# Altium PCB PCB1.PcbDoc
Units mil, origin at the board's own origin, x right, y up, seen from the top; angles counter-clockwise.
Board outline 942 x 393.7 mil, 2 copper layers (Top Layer, Bottom Layer); 25 components, 13 nets, 101 pads, 18 vias.
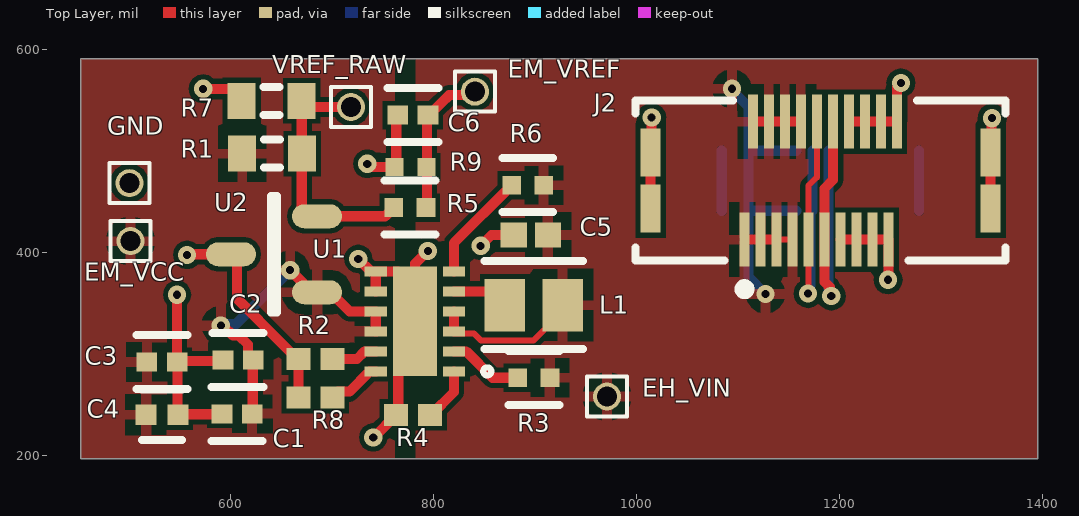
[diagram p0: Top Layer view]
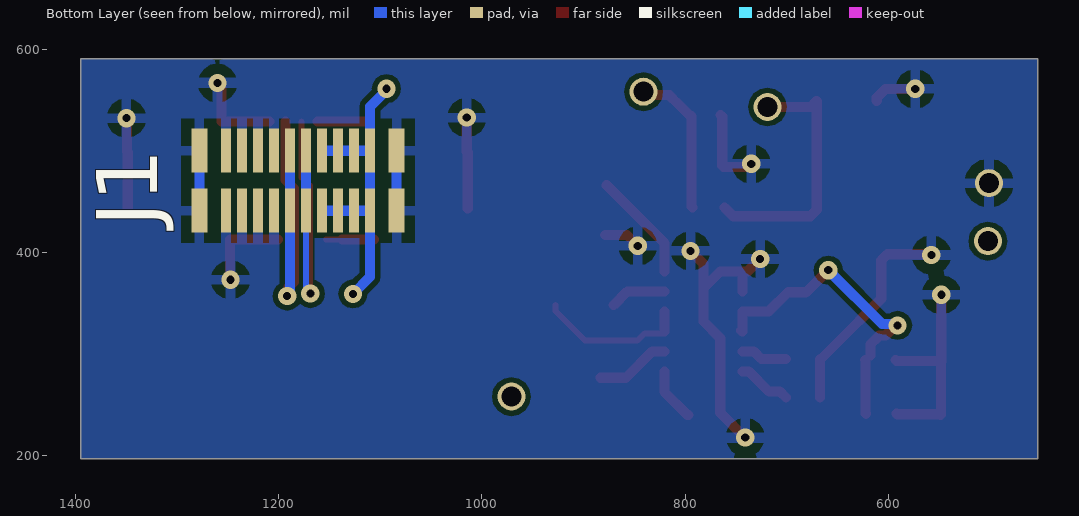
[diagram p1: Bottom Layer view, seen from below]
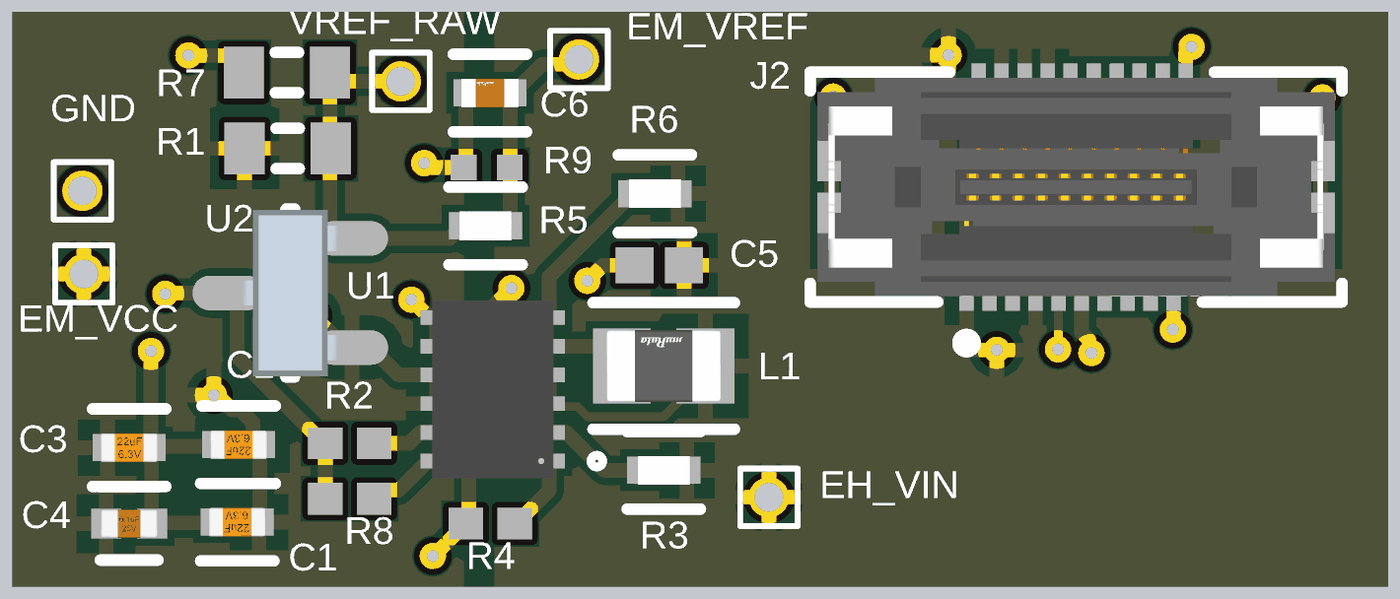
[diagram p2: 3D render of the assembled board from above, using the file's embedded part models]

## Layer stack, top to bottom
Top Solder: solder mask 0.4, Solder Resist, Dk 3.5
Top Layer: signal copper 1.4
Dielectric 1: dielectric 12.6, FR-4, Dk 4.8
Bottom Layer: signal copper 1.4
Bottom Solder: solder mask 0.4, Solder Resist, Dk 3.5

## Board outline
453,196.85 453,590.55 1395,590.55 1395,196.85

## Design rules (kind name [scope] priority, off if disabled: settings)
Clearance [All] p1: gap=5 ignorepadtopadclearanceinfootprint=FALSE
PolygonConnect [All] p1: connectstyle=Relief reliefconductorwidth=10 reliefentries=4 polygonreliefangle="90 Angle" airgapwidth=10
RoutingVias [All] p1: holewidth=8 width=18 viastyle="Through Hole" minholewidth=8 minwidth=18 maxholewidth=28 maxwidth=50
SolderMaskExpansion [All] p1: expansion=4 istentingtop=FALSE
Width [All] p1: maxlimit=40 minlimit=6 preferedwidth=10
30 further rules are at their usual default settings.

## Classes and differential pairs
component class Sheet1: C1 C2 C3 C4 C5 C6 GND J1 J2 L1 R2 R3 R4 R5 R6 R7 R8 R9 U1 U2

## Components (designator, comment, footprint, x,y, rotation, side; value= is the part's Value field where it differs from the comment)
C1 "04024D226MAT2A" FP-CL05A226MQ5N6J8-IPC_C 607,241 r180 top value=22uF
C2 "04024D226MAT2A" FP-CL05A226MQ5N6J8-IPC_C 608,294 r180 top value=22uF
C3 "04024D226MAT2A" FP-CL05A226MQ5N6J8-IPC_C 533,292 r0 top value=22uF
C4 "C0402C104K8PACTU" FP-C0402-BB-MFG 533,240 r0 top value="0.10 μF"
C5 "C0402C225M9PACTU" CAPC1005X55X30NL05T10 896,417 r0 top
C6 "GRM155R71H103KA88D" FP-GRM155-0_05-IPC_C 780,535 r180 top
EH_VIN "header_pin" 1mm_header 971,258 r0 top (schematic designator *)
EM_VCC "header_pin" 1mm_header 502,411 r270 top (schematic designator *)
EM_VREF "header_pin" 1mm_header 841,558 r0 top (schematic designator *)
GND "header_pin" 1mm_header 501,468 r270 top (schematic designator *)
J1 "2039550203" 2039550203 1181.1,472.44 r0 bottom
J2 "2039560203" Molex_0_MFG 1181.32,470.56 r0 top
L1 "LQM21PN2R2NGCD" FP-LQM21PH_G0-IPC_C 899,348 r180 top
R1 "Res3" J1-0603 641.53,497 r0 top value=0
R2 "RC0402JR-070RL" RESC1005X40X25NL05T10 684,295 r0 top
R3 "CRCW04020000Z0ED" FP-CRCW0402-e3-IPC_C 899.07,276.5 r180 top
R4 "RC0402JR-070RL" RESC1005X40X25NL05T10 780.27,240 r0 top
R5 "CRCW040210M0JNED" FP-CRCW0402-e3-IPC_C 777,444 r180 top
R6 "CRCW04020000Z0ED" FP-CRCW0402-e3-IPC_C 893,466 r180 top
R7 "Res3" J1-0603 641,549 r180 top value=0
R8 "RC0402JR-070RL" RESC1005X40X25NL05T10 684,257 r0 top
R9 "RMCF0402JT2M00" RESC1005X40X25LL05T05 777.75,484 r0 top
U1 "XTPS61094DSSR" WSON_94DSSR_TEX-L 782,332 r180 top
U2 "ISL21080DIH309Z-TK" Intersil_ISL21080DIH309Z-TK_0 643.32,398 r90 top
VREF_RAW "header_pin" 1mm_header 719,543 r0 top (schematic designator *)

## Footprints (in the part's own frame and the unit in brackets; to place one, negate y for a bottom-side part, rotate by r counter-clockwise, add the part's x,y. Pads: shape width x height; smd on the part's side, far side on the other; paste and mask are expansions set on the pad)
1mm_header [mm]
  round 0.7 hole 0.5: 1(0,0)
  silkscreen extent -0.5,-0.5 0.5,0.5
2039550203 [mm]
  rect 0.25x1.1 smd mask+0.102: 1(-1.8,0.8) 2(-1.8,-0.7) 3(-1.4,0.8) 4(-1.4,-0.7) 5(-1,0.8) 6(-1,-0.7) 7(-0.6,0.8) 8(-0.6,-0.7) 9(-0.2,0.8) 10(-0.2,-0.7) 11(0.2,0.8) 12(0.2,-0.7) 13(0.6,0.8) 14(0.6,-0.7) 15(1,0.8) 16(1,-0.7) 17(1.4,0.8) 18(1.4,-0.7) 19(1.8,0.8) 20(1.8,-0.7)
  rect 0.4x1.1 smd mask+0.102: 21(-2.465,0.8) 22(-2.465,-0.7) 23(2.465,0.8) 24(2.465,-0.7)
  body extent -2.68,-1 2.68,1, height 2.9
CAPC1005X55X30NL05T10 [mm] "Chip Capacitor, 2-Leads, Body 1.00x0.50mm, IPC Medium Density"
  rect 0.66x0.62 smd: 1(-0.43,0) 2(0.43,0)
  body extent -0.53,-0.28 0.53,0.27, height 0.55
FP-C0402-BB-MFG [mm]
  rect 0.52x0.52 smd paste+0 mask+0: 1(-0.4,0) 2(0.4,0)
  silkscreen extent -0.5,-0.64 0.5,0.64, body extent -0.8,-0.4 0.8,0.4, height 0.25
FP-CL05A226MQ5N6J8-IPC_C [mil]
  rect 20.29x18.6 smd paste+0 mask+0: 1(-14.9,0) 2(14.9,0)
  silkscreen extent -25,-27 25,27, body extent -29,-15 29,15, height 10
FP-CRCW0402-e3-IPC_C [mil]
  rect 18.43x18.6 smd paste+0 mask+0: 1(-15.83,0) 2(15.83,0)
  silkscreen extent -25,-27 25,27, body extent -29,-15 29,15, height 10
FP-GRM155-0_05-IPC_C [mil]
  rect 20.29x18.6 smd paste+0 mask+0: 1(-14.9,0) 2(14.9,0)
  silkscreen extent -25,-27 25,27, body extent -29,-15 29,15, height 10
FP-LQM21PH_G0-IPC_C [mil]
  rect 39.61x51.5 smd paste+0 mask+0: 1(-28.59,0) 2(28.59,0)
  silkscreen extent -48,-43 48,43, body extent -52,-31 52,31, height 10
Intersil_ISL21080DIH309Z-TK_0 [mm]
  rrect100% 0.6x1.25 smd paste+0 mask+0: 1(-0.95,-1.075) 2(0.95,-1.075) 3(0,1.075)
  silkscreen extent -1.46,-0.08 1.46,0.08, body extent -1.45,-1.19 1.45,1.19, height 0.47
J1-0603 [mm] "Chip Resistor, Body 1.6x0.8mm, IPC High Density"
  rect 0.7x0.9 smd: 1(-0.75,0) 2(0.75,0)
  silkscreen extent -0.2,-0.35 0.2,0.35, body extent -0.85,-0.48 0.85,0.48, height 0.9
Molex_0_MFG [mm]
  rect 0.25x1.35 smd paste+0 mask+0: 1(-1.905,-1.475) 2(-1.695,1.475) 3(-1.505,-1.475) 4(-1.295,1.475) 5(-1.105,-1.475) 6(-0.895,1.475) 7(-0.705,-1.475) 8(-0.495,1.475) 9(-0.305,-1.475) 10(-0.095,1.475) 11(0.095,-1.475) 12(0.305,1.475) 13(0.495,-1.475) 14(0.705,1.475) 15(0.895,-1.475) 16(1.105,1.475) 17(1.295,-1.475) 18(1.505,1.475) 19(1.695,-1.475) 20(1.905,1.475)
  rect 0.5x1.2 smd paste+0 mask+0: 21(-4.25,0.7) 22(4.25,0.7) 23(-4.25,-0.7) 24(4.25,-0.7)
  silkscreen extent -4.62,-2.84 4.62,2, body extent -4.72,-2.25 4.72,2.25, height 0.25
RESC1005X40X25LL05T05 [mm] "Chip Resistor, 2-Leads, Body 1.00x0.50mm, IPC High Density"
  rect 0.45x0.45 smd: 1(-0.4,0) 2(0.4,0)
  body extent -0.53,-0.27 0.53,0.28, height 0.4
RESC1005X40X25NL05T10 [mm] "Chip Resistor, 2-Leads, Body 1.00x0.50mm, IPC Medium Density"
  rect 0.6x0.55 smd: 1(-0.425,0) 2(0.425,0)
  body extent -0.53,-0.27 0.53,0.28, height 0.4
WSON_94DSSR_TEX-L [mil]
  rect 22x10 smd paste+0 mask+0: 1(-38.5,49.23) 2(-38.5,29.54) 3(-38.5,9.85) 4(-38.5,-9.85) 5(-38.5,-29.54) 6(-38.5,-49.23) 7(38.5,-49.23) 8(38.5,-29.54) 9(38.5,-9.85) 10(38.5,9.85) 11(38.5,29.54) 12(38.5,49.23)
  rect 43x108 smd paste+0 mask+0: 13(0,0)
  silkscreen extent -75,45 -67,53, body extent -42,-61 41,61, height 32

## Part data
C1 C2 C3: library part CMP-13271-000001-1, "CAP CER 22UF 6.3V X5R 0402", Capacitance=22uF, Manufacturer="Samsung Electro-Mechanics", Manufacturer Part Number=CL05A226MQ5N6J8, Package=0402, Temperature="-55°C to +85°C", Temperature Characteristic=X5R, Temperature Coefficient=15%, Temperature Range High=+85°C, Temperature Range Low=-55°C, Tolerance=20%, Voltage Rating=6.3V, Automotive=No, Category=Cap, ComponentLink2Description=Datasheet, ComponentLink2URL=http://www.samsungsem.com/kr/support/library/product-catalog/__icsFiles/afieldfile/2018/11/28/MLCC.pdf, Device Class L1="Passive Components", Device Class L2=Capacitors, Device Class L3="Ceramic Capacitors", Digikey Description="CAP CER 22UF 6.3V X5R 0402", Height=0.55mm, Ipc Land Pattern Name=CAPC10050X50, Lead Free=Yes, Material=Ceramic, Octopart=https://octopart.com/cl05a226mq5n6j8-samsung-82337113, RoHS=TRUE
C4: library part CMP-2008-02046-2, "CAP CER 0.1UF 10V X5R 0402", Capacitance="0.10 μF", Manufacturer=Kemet, Package=C0402-BB, Temperature="-55°C to +125°C", Temperature Characteristic=X5R, Temperature Coefficient=15%, Temperature Range High=+125°C, Temperature Range Low=-55°C, Tolerance=0.1, Voltage Rating="10 V", Automotive=No, Category=Cap, ComponentLink2Description=Datasheet, ComponentLink2URL=https://content.kemet.com/datasheets/KEM_C1002_X7R_SMD.pdf, Device Class L1="Passive Components", Device Class L2=Capacitors, Device Class L3="Ceramic Capacitors", Digikey Description="CAP CER 0.1UF 10V X5R 0402", Height=0.55mm, Ipc Land Pattern Name=CAPC10050X50, Lead Free=Yes, Manufacturer Part Number=C0402C104K8PACTU, Material=Ceramic, Mouser Description="Capacitor 100 nF 10 VDC 0402", Octopart=https://octopart.com/c0402c104k8pactu-kemet-140039, RoHS=TRUE
C5: library part CMP-2008-02064-2, Manufacturer=Kemet, Part Number=C0402C225M9PACTU
C6: library part CMP-2008-04637-5, "Chip Multilayer Ceramic Capacitors for General Purpose, 0402, 10000pF, X7R, 15%, 10%, 50V", Capacitance=10nF, Case Code (Imperial)=0402, Case Code (Metric)=1005, Dielectric=X7R, Max Operating Temperature=125°C, Min Operating Temperature=-55°C, Package Quantity=1, Tolerance=10%, Voltage=25V, Voltage Rating=50V, Case/Package=0402, Depth=0.5mm, Height=0.5mm, Lead Free="Lead Free", Length=1mm, Material=Ceramic, Mount="Surface Mount", Number of Pins=2, Packaging="Tape and Reel", Radiation Hardening=No, REACH SVHC="No SVHC", Termination=SMD/SMT, Thickness=0.022inch, Voltage Rating (DC)=50V, Width=0.02inch
J2: "20 Position Connector Plug, Outer Shroud Contacts Surface Mount Gold", Current Rating=0.3A, Digikey Part Number=900-2039560203CT-ND, Manufacturer=Molex, Mouser Part Number=538-203956-0203, Package=0, Temperature="-40°C to +125°C", Temperature Range High=+125°C, Temperature Range Low=-40°C, Voltage Rating=40V, Automotive=No, ComponentLink1Description=Upverter, ComponentLink1URL=https://upverter.com/part/id/0a58283e91808ac4/, ComponentLink2Description=Datasheet, ComponentLink2URL=https://www.molex.com/webdocs/datasheets/pdf/en-us/2039560203_PCB_HEADERS.pdf, Conn Gender=Male, Conn Orientation=Vertical, Contact Material=Gold,Nickel, Datasheet Path=datasheets/Conn_Molex_2039560203_eec.pdf, Digikey Description="CONN PLUG 20POS SMD GOLD", Footprint Url=https://www.molex.com/pdm_docs/sd/2039560203_sd.pdf, Height=4.55mm, helpURL=https://upverter.com/part/id/0a58283e91808ac4/, Is Female=no, Lead Free=Yes, Number Of Contacts=20, Number Of Rows=2, Part Number=2039560203, Pitch=0.4mm, RoHS=TRUE, Supplier 1=Digi-Key, Supplier 2=Mouser, Supplier Part Number 1=900-2039560203CT-ND, Supplier Part Number 2=538-203956-0203, Symbol Hash=db22f1623fbfed54a22177e49599976dea34d6b12f98f445fc170047d3fb1d12, Verification Version=0.0.0.3
L1: library part CMP-06042-016317-1, "Multilayer Type Inductor for Power Lines, 0805 (2012), 2.2μH, 30%, 0.288Ω, 0.8A", Case Code (Imperial)=0805, Case Code (Metric)=2012, Current Rating=800mA, DC Resistance (DCR)=288mR, Inductance=2.2uH, Inductance Tolerance=30%, Max Operating Temperature=125°C, Min Operating Temperature=-55°C, Package Quantity=4000, Self Resonant Frequency=40MHz, Test Frequency=1MHz, Case/Package=0805, Core Material=Ferrite, DC Current=800mA, Depth=1.4mm, Height=0.9mm, Height - Seated (Max)=0.039inch, Lead Free="Lead Free", Length=2mm, Max DC Current=800mA, Military Standard=Not, Mount="Surface Mount", Packaging="Tape and Reel", Radiation Hardening=No, REACH SVHC="No SVHC", RoHS Compliant=Yes, Series=LQM, Shielding=Shielded, Termination=SMD/SMT, Tolerance=30%, Width=0.049inch
R1 R7: "Resistor", LatestRevisionDate=29-May-2009, LatestRevisionNote="IPC-7351 Footprint Added.", PackageDescription="Chip Resistor", PackageReference=J1-0603, Published=8-Jun-2000, Publisher="Altium Limited"
R2 R4 R8: library part CMP-1011-00001-2, Manufacturer="Yageo / Phycomp", Part Number=RC0402JR-070RL
R3 R6: library part CMP-2002-08122-2, "RES Thick Film, 0Ω, 0.063W, 0402", Case Code (Imperial)=0402, Case Code (Metric)=1005, Max Operating Temperature=155°C, Max Power Dissipation=63mW, Min Operating Temperature=-55°C, Package Quantity=1, Resistance=0mR, Temperature Coefficient=100ppm/°C, Tolerance=5%, Voltage Rating=50V, Case/Package=0402, Composition="Thick Film", Contact Plating=Tin, Depth=0.5mm, Features="Automotive AEC-Q200", Height=0.35mm, Lead Free="Lead Free", Length=1mm, Military Standard=Not, Mount="Surface Mount", Number of Terminations=2, Packaging="Tape and Reel", Power Rating=63mW, Radiation Hardening=No, Termination=SMD/SMT, Voltage Rating (DC)=50V, Weight=2.3E-05oz, Width=0.5mm
R5: library part CMP-1011-00170-3, "RES Thick Film, 10MΩ, 5%, 0.063W, 200ppm/°C, 0402", Case Code (Imperial)=0402, Case Code (Metric)=1005, Max Operating Temperature=155°C, Max Power Dissipation=63mW, Min Operating Temperature=-55°C, Package Quantity=1, Resistance=10MR, Temperature Coefficient=200ppm/°C, Tolerance=5%, Voltage Rating=50V, Case/Package=0402, Composition="Thick Film", Contact Plating=Tin, Depth=0.5mm, Features="Automotive AEC-Q200", Height=0.016inch, Lead Free="Lead Free", Length=1mm, Military Standard=Not, Number of Terminations=2, Packaging="Tape and Reel", Power Rating=63mW, Radiation Hardening=No, Termination=SMD/SMT, Voltage Rating (DC)=50V, Weight=2.3E-05oz, Width=0.5mm
R9: library part CMP-1011-00881-2, Manufacturer="Vishay Dale", Part Number=CRCW04022M00FKED, Resistance=2M
U1: "No Description Available", Built_By=EMA_Matt, Copyright="Copyright (C) 2018 Accelerated Designs. All rights reserved", Datasheet=https://www.ti.com/lit/ds/symlink/tps61094.pdf?ts=1615883226162, Manufacturer_Part_Number=XTPS61094DSSR, RefDes=RefDes, SourceLibrary=Add_to_database_2021-03-17, Type=DEV, Vendor="Texas Instruments"
U2: library part IC_Intersil_ISL21080DIH309Z-TK_eec, "IC VREF SERIES 0.9V SOT23-3", Digikey Part Number=ISL21080DIH309Z-TKCT-ND, Manufacturer=Intersil, Mouser Part Number=968-ISL21080DIH309ZT, Package=SOT23-3, Temperature="-40°C to +85°C", Temperature Range High=+85°C, Temperature Range Low=-40°C, ComponentLink1Description=Upverter, ComponentLink1URL=https://upverter.com/upn/revision/cea4d3e56c7c7365/, ComponentLink2Description=Datasheet, ComponentLink2URL=https://www.intersil.com/content/dam/Intersil/documents/isl2/isl21080.pdf, Digikey Description="IC VREF SERIES 0.9V SOT23-3", helpURL=https://upverter.com/upn/revision/cea4d3e56c7c7365/, Lead Free=yes, Part Number=ISL21080DIH309Z-TK, Price=1.15623202851, RoHS=TRUE, Supplier 1=Digi-Key, Supplier 2=Mouser, Supplier Part Number 1=ISL21080DIH309Z-TKCT-ND, Supplier Part Number 2=968-ISL21080DIH309ZT

## Via types
v1: diameter 18, hole 8, Top Layer to Bottom Layer, 18 vias

## Nets (pads, with @x,y where several pads share a name; then routed paths per layer and width w, separated by ;. In a path a pad name is that pad's centre, name@x,y a point inside that pad or via, vN(x,y) a via of type N, cw(c..) or ccw(c..) an arc to the next point about the centre after c; other vN are vias at no path point)
AIN0: J1.9 J1.10 J2.9 J2.10 | length 315.2
  Top Layer w6: v1(1168.94,359.4) 1169.31,359.78 J2.9 1169.31,465.46 1177.58,473.73 J2.10
  Bottom Layer w6: v1(1168.94,359.4) 1168.94,362.65 1173.23,366.94 J1.9
  Bottom Layer w10: J1.9 J1.10
AIN1: J1.11 J1.12 J2.11 J2.12 | length 322.2
  Top Layer w10: v1(1191.8,356.91) 1190.27,358.44 1190.27,365.7 1185.06,370.91 J2.11 1185.06,462.83 1193.33,471.1 J2.12
  Bottom Layer w10: J1.12 J1.11 1188.98,361.9 1191.8,359.08 v1(1191.8,356.91)
EH_VIN: C5.2 EH_VIN.1 J1.1 J1.2 J1.3 J1.4 J1.5 J1.6 J1.7 J1.8 J2.1 J2.2 J2.3 J2.4 J2.5 J2.6 J2.7 J2.8 L1.1 R3.1 R6.1 U1.3 U1.4 | length 553
  Top Layer w6: U1.3 822.5,320.15 839.97,320.15 846.88,313.25 898.78,313.25 927.59,342.05 L1.1 ; J2.5 J2.7
  Top Layer w10: U1.3 U1.4 ; J2.1 J2.3 J2.5 ; J2.2 J2.4 J2.6 J2.8
  Bottom Layer w10: v1(1094,561) 1094,559.53 1110.24,543.3 J1.2 ; v1(1127,359) 1110.24,375.76 J1.1 ; J1.7 J1.5 J1.3 J1.1 ; J1.8 J1.6 J1.4 J1.2 ; J1.1 J1.2
EM_VCC: C1.1 C2.1 C3.1 C4.1 EM_VCC.1 R1.1 U1.9 U1.10 U2.1 | length 312
  Top Layer w10: v1(591,328) 593.16,328 603.16,318 609,318 617.76,309.24 C2.1@617.76,298.3 ; C1.1 622.4,241.5 622.4,293.5 C2.1 ; v1(659.17,382.42) 681,360.6 U2.1 698.85,360.6 717.6,341.85 U1.9 743.5,324.5 745,323 744.15,322.15 U1.10
  Bottom Layer w10: v1(591,328) 592.53,329.53 606.29,329.53 v1(659.17,382.42)
EM_VREF: C6.1 EM_VREF.1 R5.1 R9.2 | length 147.5
  Top Layer w10: R5.1 793.87,445.04 793.87,533.96 794.71,533.96 807.75,547 808,547 815.64,554.64 837.64,554.64 EM_VREF.1
GND: C1.2 C2.2 C3.2 C4.2 C5.1 C6.2 GND.1 J1.13 J1.14 J1.15 J1.16 J1.17 J1.18 J1.19 J1.20 J1.21 J1.22 J1.23 J1.24 J2.13 J2.14 J2.15 J2.16 J2.17 J2.18 J2.19 J2.20 J2.21 J2.22 J2.23 J2.24 R2.1 R4.1 R7.2 R8.1 R9.1 U1.7 U1.8 U1.13 U2.3 | length 1348.2
  Top Layer w10: v1(547.9,358.24) C3.2 C3.2@548.37,292.47 ; v1(557.7,397.39) 558.3,398 U2.3 607,392 607,354.28 651,310.28 666.28,295 R2.1 R8.1 ; v1(573.54,560.81) 602.69,560.81 611.47,552.03 R7.2 ; C1.2 591.6,240.5 549.25,240.5 C4.2 548.37,240.37 C3.2@548.37,292.47 ; C2.2 592.1,293 548.9,293 C3.2@548.37,292.47 ; v1(726.21,393.45) 738.44,381.23 U1.7 ; v1(735,487) 737.16,487 740.16,484 R9.1 763.55,485.55 763.55,533.45 C6.2 ; v1(740.91,217.76) 741.3,217.76 R4.1 765.5,241.96 765.5,315.5 U1.13 U1.13@782,364.5 ; U1.8 U1.7 ; v1(794.7,401.34) 782,388.64 U1.13@782,364.5 ; v1(846.69,406.36) 857.33,417 C5.1 ; J2.23 J2.21 1014.97,499.09 v1(1014.97,532.57) ; J2.13 J2.15 J2.17 J2.19 1248.06,373.37 v1(1247.61,372.93) ; J2.14 J2.16 J2.18 J2.20 1256.32,562.55 v1(1260.39,566.62) ; J2.24 J2.22 1349.32,498.8 1349.32,531.32 v1(1350,532) ; U1.7 765.27,381.23 U1.13@782,364.5
  Bottom Layer w10: J1.21 J1.22 ; J1.23 J1.24
NetL1_2: L1.2 U1.5 | length 55.5
  Top Layer w10: U1.5 856.88,361.54 L1.2
NetR2_2: R2.2 U1.11 | length 45.9
  Top Layer w10: R2.2 725,295 732.47,302.46 U1.11
NetR3_2: R3.2 U1.2 | length 73.5
  Top Layer w10: U1.2 832.37,302.46 858.33,276.5 R3.2
NetR4_2: R4.2 U1.1 | length 53.1
  Top Layer w10: R4.2 797.98,240 820.5,262.52 U1.1
NetR6_2: R6.2 U1.6 | length 108.2
  Top Layer w10: U1.6 820.5,409.25 877.17,465.92 R6.2
NetR8_2: R8.2 U1.12 | length 53.4
  Top Layer w10: R8.2 706.56,262.83 717.55,262.83 737.5,282.77 U1.12
VREF_RAW: R1.2 R5.2 R7.1 U2.2 VREF_RAW.1 | length 255.1
  Top Layer w10: VREF_RAW.1 676.53,543 R7.1 670.53,441.69 676.82,435.4 U2.2 752.65,435.4 761.17,443.92 R5.2

## Polygon pours and split planes (outlines as drawn)
EM_VCC on Top Layer "EM_VCC_L01_P011" (solid, pour order 11): 453,196.85 762.03,196.85 762.03,590.55 453,590.55
EH_VIN on Top Layer "EH_VIN_L01_P010" (solid, pour order 10): 1395,196.85 782.97,196.85 782.97,590.55 1395,590.55
GND on Bottom Layer "GND_L02_P009" (solid, pour order 9): 453,196.85 453,590.55 1395,590.55 1395,196.85

## Silkscreen, mask and mechanical layers (free items; w line width, h text height)
Mechanical 1:
  the board outline again, w4